# Altium PCB MainBoard.PcbDoc (part 1 of 2)
Units mm, origin at the board's own origin, x right, y up, seen from the top; angles counter-clockwise.
Board outline 250 x 90 mm, 2 copper layers (Top Layer, Bottom Layer); 239 components, 149 nets, 765 pads, 496 vias.
Unrouted connection lines stored in the file: 4.
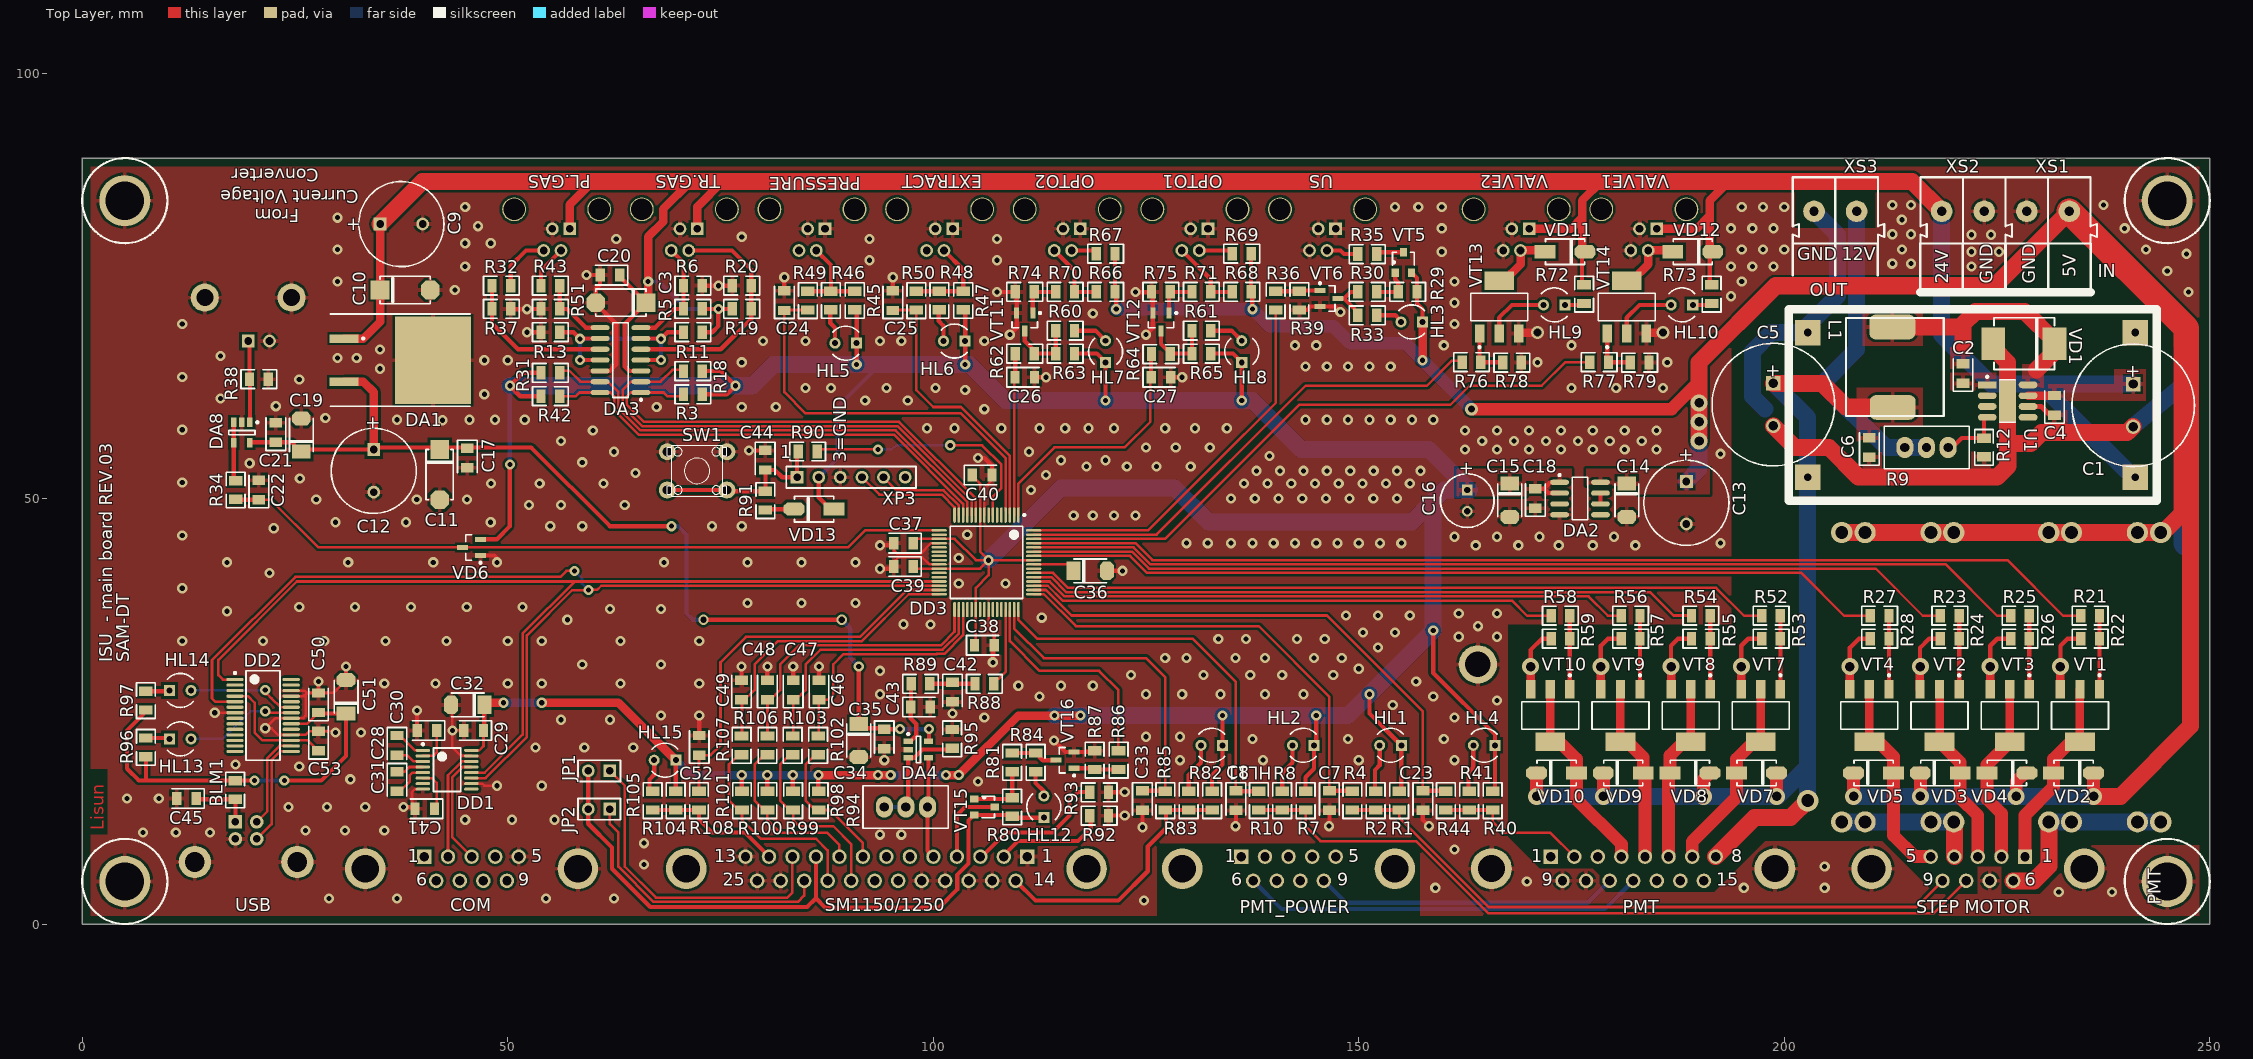
[diagram p0: Top Layer view]
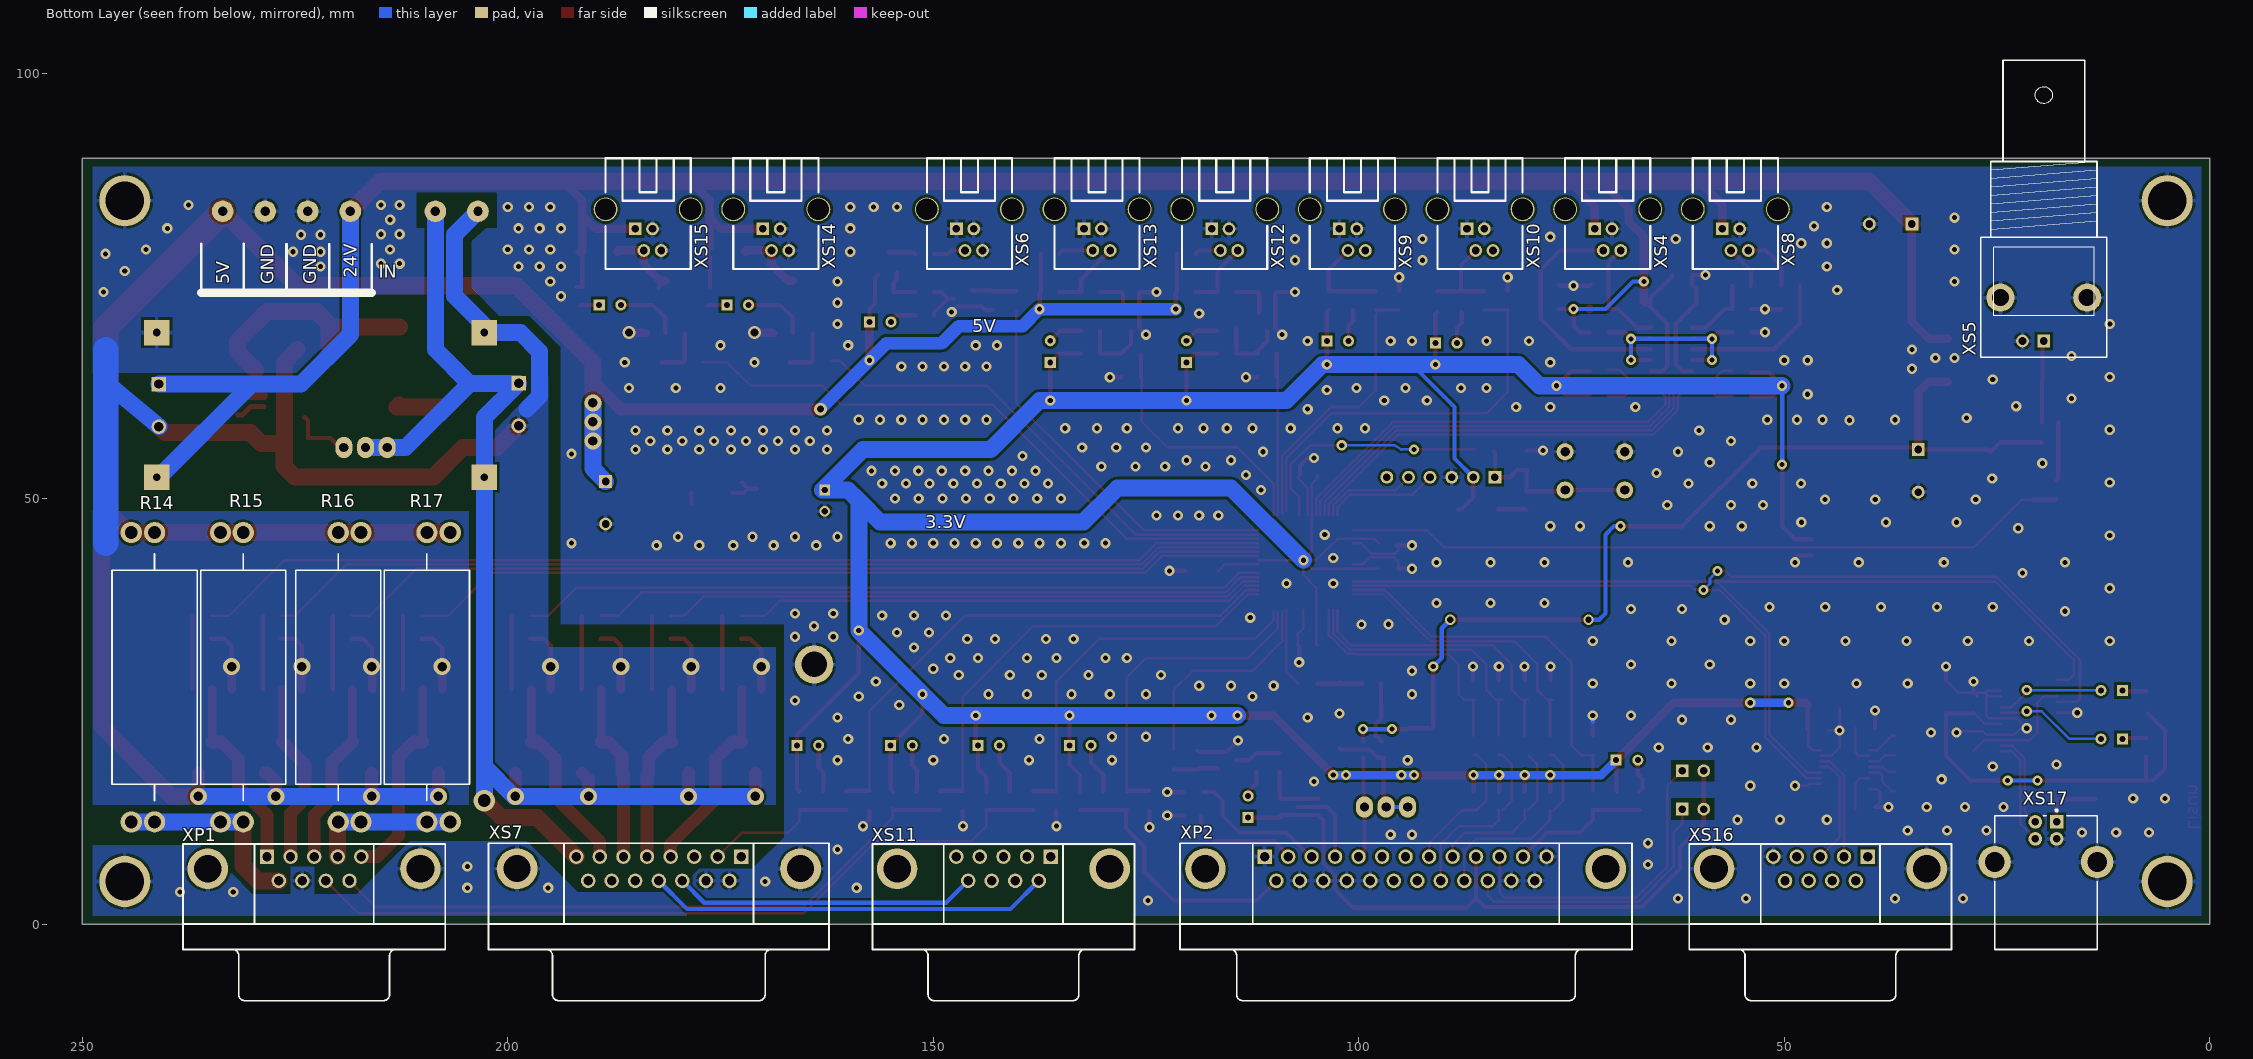
[diagram p1: Bottom Layer view, seen from below]

## Layer stack, top to bottom
Top Layer: signal copper 0.0356
Dielectric: dielectric 0.32, FR-4, Dk 4.8
Bottom Layer: signal copper 0.0356

## Board outline
250.001,0.002 250.001,90.002 0.001,90.002 0.001,0.002

## Design rules (kind name [scope] priority, off if disabled: settings)
Clearance Clearance_2 [All vs IsRegion] p1: gap=0.3
Clearance Clearance_1 [(InComponentClass('All Components')) vs (InComponentClass('All Components'))] p2: gap=0.2
Clearance [(InNetClass('All Nets')) vs (InNetClass('All Nets'))] p3: gap=0.2
ComponentClearance [All] p1: gap=0.2 collisioncheckmode=3 verticalgap=0.3 showdistances=FALSE
HoleSize [All] p1: absolutevalues=TRUE maxlimit=5 minlimit=0.025 maxpercent=80.000 minpercent=20.000
PlaneClearance PlaneClearance_1 [(InNetClass('All Nets'))] p1: clearance=0.5
PlaneClearance [All] p2: clearance=1.5
PlaneConnect [All] p1: planeconnectstyle=Relief reliefexpansion=0.508 reliefentries=4 reliefconductorwidth=0.5 reliefairgap=0.5
PolygonConnect PolygonConnect_2 [Isvia] p1: connectstyle=Direct reliefconductorwidth=0.254 reliefentries=4 polygonreliefangle="90 Angle"
PolygonConnect PolygonConnect_1 [All] p2: connectstyle=Relief reliefconductorwidth=0.5 reliefentries=4 polygonreliefangle="90 Angle"
RoutingVias [All] p1: holewidth=0.6 width=1 viastyle="Through Hole" minholewidth=0.5 minwidth=0.8 maxholewidth=4 maxwidth=4
SilkToSilkClearance [(InComponentClass('All Components')) vs (InComponentClass('All Components'))] p1: silktosilkclearance=0.1
SilkscreenOverComponentPads [All] p1: minsilkscreentomaskgap=0.1
SolderMaskExpansion [All] p1: expansion=0.102
Width [All] p1: maxlimit=3 minlimit=0.2 preferedwidth=0.2
22 further rules are at their usual default settings.

## Components (designator, comment, footprint, x,y, rotation, side; value= is the part's Value field where it differs from the comment)
BLM1 "BLM21PG221SN1D" CR2012-0805#1 18.001,15.752 r90 top
C1 "Конденсатор К50-68" CAPPR5-14x20 241.001,60.952 r270 top
C2 "Конденсатор ЧИП" CC2012-0805 221.001,64.702 r270 top
C3 "Tantal C case" C 63.251,73.017 r0 top
C4 "Конденсатор ЧИП" CC2012-0805 231.751,60.952 r270 top
C5 "Конденсатор К50-68" CAPPR5-14x20 198.721,61.035 r270 top
C6 "Конденсатор ЧИП" CC2012-0805 210.001,56.002 r270 top
C7 "Конденсатор ЧИП" CC2012-0805 146.549,14.502 r90 top
C8 "Конденсатор ЧИП" CC2012-0805 135.563,14.502 r90 top
C9 "Конденсатор К50-68" CAPPR5-10x20 37.501,82.252 r0 top
C10 "Tantal C case" C 38.001,74.502 r180 top
C11 "Tantal C case" C 42.001,52.752 r90 top
C12 "Конденсатор К50-68" CAPPR5-10x20 34.251,53.252 r270 top
C13 "Конденсатор К50-68" CAPPR5-10x20 188.501,49.502 r270 top
C14 "Tantal B case" B 181.501,49.752 r90 top
C15 "Tantal B case" B 167.751,49.752 r90 top
C16 "Конденсатор К50-68" CAPPR2.5-6.3X5 162.751,49.752 r270 top
C17 "Конденсатор ЧИП" CC2012-0805 45.251,54.752 r90 top
C18 "Конденсатор ЧИП" CC2012-0805 170.751,50.002 r270 top
C19 "Tantal B case" B 25.751,57.502 r270 top
C20 "Конденсатор ЧИП" CC2012-0805 62.001,76.252 r0 top
C21 "Конденсатор ЧИП" CC2012-0805 22.751,57.752 r270 top
C22 "Конденсатор ЧИП" CC2012-0805 20.751,51.002 r270 top
C23 "Конденсатор ЧИП" CC2012-0805 157.536,14.502 r90 top
C24 "Конденсатор ЧИП" CC2012-0805 82.501,73.252 r270 top
C25 "Конденсатор ЧИП" CC2012-0805 95.251,73.252 r270 top
C26 "Конденсатор ЧИП" CC2012-0805 110.751,64.252 r180 top
C27 "Конденсатор ЧИП" CC2012-0805 126.751,64.252 r180 top
C28 "Конденсатор ЧИП" CC2012-0805 37.001,21.002 r90 top
C29 "Конденсатор ЧИП" CC2012-0805 46.001,22.752 r0 top
C30 "Конденсатор ЧИП" CC2012-0805 40.501,22.752 r0 top
C31 "Конденсатор ЧИП" CC2012-0805 37.001,16.752 r90 top
C32 "Tantal B case" B 45.251,25.752 r0 top
C33 "Конденсатор ЧИП" CC2012-0805 124.576,14.502 r90 top
C34 "Tantal B case" B 91.251,21.502 r90 top
C35 "Конденсатор ЧИП" CC2012-0805 94.251,21.752 r90 top
C36 "Tantal B case" B 118.501,41.502 r180 top
C37 "Конденсатор ЧИП" CC2012-0805 96.501,44.752 r0 top
C38 "Конденсатор ЧИП" CC2012-0805 106.001,32.752 r180 top
C39 "Конденсатор ЧИП" CC2012-0805 96.501,42.002 r0 top
C40 "Конденсатор ЧИП" CC2012-0805 105.751,52.752 r180 top
C41 "Конденсатор ЧИП" CC2012-0805 40.251,13.552 r0 top
C42 "Конденсатор ЧИП" CC2012-0805 102.251,27.252 r90 top
C43 "Конденсатор ЧИП" CC2012-0805 98.501,25.502 r180 top
C44 "Конденсатор ЧИП" CC2012-0805 80.251,54.502 r90 top
C45 "Конденсатор ЧИП" CC2012-0805 12.251,14.752 r0 top
C46 "Конденсатор ЧИП" CC2012-0805 86.576,27.502 r270 top
C47 "Конденсатор ЧИП" CC2012-0805 83.543,27.502 r270 top
C48 "Конденсатор ЧИП" CC2012-0805 80.509,27.502 r270 top
C49 "Конденсатор ЧИП" CC2012-0805 77.476,27.502 r270 top
C50 "Конденсатор ЧИП" CC2012-0805 27.751,26.002 r270 top
C51 "Tantal B case" B 31.001,26.752 r270 top
C52 "Конденсатор ЧИП" CC2012-0805 72.501,21.002 r270 top
C53 "Конденсатор ЧИП" CC2012-0805 27.751,21.502 r270 top
DA1 "L7812ACD2T" TO-263 36.001,66.252 r270 top
DA2 "LP2951CD-3.3" 751-05_N 176.001,50.002 r0 top
DA3 "LM339AD" SO14_N 63.251,66.267 r180 top
DA4 "LM321MF" MF05A_N 98.251,20.502 r0 top
DA8 "LM321MF" MF05A_N 18.751,57.752 r270 top
DD1 "MAX3232CUE" TSSOP16_N 42.876,18.127 r0 top
DD2 "FT232RL" SOP65P760-28L 21.251,24.502 r0 top
DD3 "PIC24FJ128GA106-I/PT" TQFP-PT64_N 106.251,42.502 r270 top
HL1 "LED" "LED 2.54mm" 155.001,21.002 r270 top
HL2 "LED" "LED 2.54mm" 144.751,21.002 r270 top
HL3 "LED" "LED 2.54mm" 157.501,70.752 r270 top
HL4 "LED" "LED 2.54mm" 166.001,21.002 r270 top
HL5 "LED" "LED 2.54mm" 91.001,68.252 r270 top
HL6 "LED" "LED 2.54mm" 103.751,68.502 r270 top
HL7 "LED" "LED 2.54mm" 120.251,66.002 r180 top
HL8 "LED" "LED 2.54mm" 136.251,66.002 r180 top
HL9 "LED" "LED 2.54mm" 174.251,72.752 r270 top
HL10 "LED" "LED 2.54mm" 189.251,72.752 r270 top
HL11 "LED" "LED 2.54mm" 134.001,21.002 r270 top
HL12 "LED" "LED 2.54mm" 113.001,12.502 r180 top
HL13 "LED" "LED 2.54mm" 10.251,21.752 r90 top
HL14 "LED" "LED 2.54mm" 10.251,27.451 r90 top
HL15 "LED" "LED 2.54mm" 69.751,19.252 r270 top
JP1 "Перемычка вилка 2x" HDR2 62.001,18.002 r180 top
JP2 "Перемычка вилка 2x" HDR2 62.001,13.502 r180 top
L1 "Индуктивность CDRH127" CDRH127 212.751,70.202 r270 top
R1 "резистор чип" CR2012-0805#1 154.764,14.502 r90 top
R2 "резистор чип" CR2012-0805#1 151.968,14.502 r270 top
R3 "резистор чип" CR2012-0805#1 71.751,62.267 r180 top
R4 "резистор чип" CR2012-0805#1 149.271,14.502 r90 top
R5 "резистор чип" CR2012-0805#1 71.751,72.255 r0 top
R6 "резистор чип" CR2012-0805#1 71.751,74.992 r0 top
R7 "резистор чип" CR2012-0805#1 143.778,14.502 r90 top
R8 "резистор чип" CR2012-0805#1 140.981,14.502 r270 top
R9 "Trimming Potentiometer" 3296W 219.251,56.002 r180 top
R10 "резистор чип" CR2012-0805#1 138.284,14.502 r90 top
R11 "резистор чип" CR2012-0805#1 71.751,69.517 r0 top
R12 "резистор чип" CR2012-0805#1 223.501,56.002 r90 top
R13 "резистор чип" CR2012-0805#1 55.001,69.567 r180 top
R14 "Резистор 5 Вт" SQP5W 241.501,12.002 r90 bottom
R15 "Резистор 5 Вт" SQP5W 231.084,12.002 r90 bottom
R16 "Резистор 5 Вт" SQP5W 219.918,12.002 r90 bottom
R17 "Резистор 5 Вт" SQP5W 209.501,12.002 r90 bottom
R18 "резистор чип" CR2012-0805#1 71.751,65.002 r180 top
R19 "резистор чип" CR2012-0805#1 77.501,72.305 r180 top
R20 "резистор чип" CR2012-0805#1 77.501,75.042 r180 top
R21 "резистор чип" CR2012-0805#1 235.951,36.252 r180 top
R22 "резистор чип" CR2012-0805#1 235.951,33.502 r0 top
R23 "резистор чип" CR2012-0805#1 219.451,36.202 r0 top
R24 "резистор чип" CR2012-0805#1 219.451,33.502 r0 top
R25 "резистор чип" CR2012-0805#1 227.701,36.202 r0 top
R26 "резистор чип" CR2012-0805#1 227.701,33.502 r0 top
R27 "резистор чип" CR2012-0805#1 211.201,36.202 r0 top
R28 "резистор чип" CR2012-0805#1 211.201,33.502 r0 top
R29 "резистор чип" CR2012-0805#1 155.751,74.252 r0 top
R30 "резистор чип" CR2012-0805#1 151.001,74.252 r0 top
R31 "резистор чип" CR2012-0805#1 55.001,64.752 r0 top
R32 "резистор чип" CR2012-0805#1 49.251,74.992 r0 top
R33 "резистор чип" CR2012-0805#1 151.001,71.502 r0 top
R34 "резистор чип" CR2012-0805#1 18.001,51.002 r270 top
R35 "резистор чип" CR2012-0805#1 151.001,78.752 r180 top
R36 "резистор чип" CR2012-0805#1 140.251,73.252 r90 top
R37 "резистор чип" CR2012-0805#1 49.251,72.255 r0 top
R38 "резистор чип" CR2012-0805#1 20.751,64.002 r0 top
R39 "резистор чип" CR2012-0805#1 143.001,73.252 r270 top
R40 "резистор чип" CR2012-0805#1 165.751,14.502 r90 top
R41 "резистор чип" CR2012-0805#1 162.954,14.502 r270 top
R42 "резистор чип" CR2012-0805#1 55.001,62.002 r0 top
R43 "резистор чип" CR2012-0805#1 55.001,75.042 r180 top
R44 "резистор чип" CR2012-0805#1 160.258,14.502 r90 top
R45 "резистор чип" CR2012-0805#1 90.751,73.267 r270 top
R46 "резистор чип" CR2012-0805#1 88.001,73.267 r90 top
R47 "резистор чип" CR2012-0805#1 103.501,73.267 r270 top
R48 "резистор чип" CR2012-0805#1 100.751,73.267 r90 top
R49 "резистор чип" CR2012-0805#1 85.251,73.252 r270 top
R50 "резистор чип" CR2012-0805#1 98.001,73.252 r270 top
R51 "резистор чип" CR2012-0805#1 55.001,72.305 r180 top
R52 "резистор чип" CR2012-0805#1 198.451,36.202 r0 top
R53 "резистор чип" CR2012-0805#1 198.451,33.502 r0 top
R54 "резистор чип" CR2012-0805#1 190.201,36.202 r0 top
R55 "резистор чип" CR2012-0805#1 190.201,33.502 r0 top
R56 "резистор чип" CR2012-0805#1 181.951,36.202 r0 top
R57 "резистор чип" CR2012-0805#1 181.951,33.502 r0 top
R58 "резистор чип" CR2012-0805#1 173.701,36.202 r0 top
R59 "резистор чип" CR2012-0805#1 173.701,33.502 r0 top
R60 "резистор чип" CR2012-0805#1 115.501,69.752 r180 top
R61 "резистор чип" CR2012-0805#1 131.501,69.752 r180 top
R62 "резистор чип" CR2012-0805#1 110.751,67.002 r0 top
R63 "резистор чип" CR2012-0805#1 115.501,67.002 r0 top
R64 "резистор чип" CR2012-0805#1 126.751,67.002 r180 top
R65 "резистор чип" CR2012-0805#1 131.501,67.002 r0 top
R66 "резистор чип" CR2012-0805#1 120.251,74.252 r0 top
R67 "резистор чип" CR2012-0805#1 120.251,78.752 r0 top
R68 "резистор чип" CR2012-0805#1 136.251,74.252 r0 top
R69 "резистор чип" CR2012-0805#1 136.251,78.752 r0 top
R70 "резистор чип" CR2012-0805#1 115.501,74.252 r0 top
R71 "резистор чип" CR2012-0805#1 131.501,74.252 r0 top
R72 "резистор чип" CR2012-0805#1 176.501,74.017 r90 top
R73 "резистор чип" CR2012-0805#1 191.501,74.017 r90 top
R74 "резистор чип" CR2012-0805#1 110.751,74.252 r0 top
R75 "резистор чип" CR2012-0805#1 126.751,74.252 r0 top
R76 "резистор чип" CR2012-0805#1 163.251,66.002 r0 top
R77 "резистор чип" CR2012-0805#1 178.251,66.002 r0 top
R78 "резистор чип" CR2012-0805#1 168.001,66.002 r180 top
R79 "резистор чип" CR2012-0805#1 183.001,66.002 r180 top
R80 "резистор чип" CR2012-0805#1 109.251,13.752 r270 top
R81 "резистор чип" CR2012-0805#1 109.251,19.002 r270 top
R82 "резистор чип" CR2012-0805#2 132.741,14.502 r90 top
R83 "резистор чип" CR2012-0805#2 130.044,14.502 r270 top
R84 "резистор чип" CR2012-0805#1 112.001,19.002 r270 top
R85 "резистор чип" CR2012-0805#2 127.248,14.502 r90 top
R86 "резистор чип" CR2012-0805#1 121.751,19.252 r270 top
R87 "резистор чип" CR2012-0805#1 119.001,19.252 r90 top
R88 "резистор чип" CR2012-0805#1 106.001,28.252 r180 top
R89 "резистор чип" CR2012-0805#1 98.501,28.252 r180 top
R90 "резистор чип" CR2012-0805#1 85.251,55.502 r0 top
R91 "резистор чип" CR2012-0805#1 80.251,49.752 r270 top
R92 "резистор чип" CR2012-0805#2 119.501,12.752 r0 top
R93 "резистор чип" CR2012-0805#2 119.501,15.502 r0 top
R94 "Trimming Potentiometer" 3296W 94.251,13.752 r0 top
R95 "резистор чип" CR2012-0805#1 102.251,21.752 r90 top
R96 "резистор чип" CR2012-0805#1 7.501,20.752 r90 top
R97 "резистор чип" CR2012-0805#1 7.501,26.252 r90 top
R98 "резистор чип" CR2012-0805#1 86.501,14.502 r270 top
R99 "резистор чип" CR2012-0805#1 83.501,14.502 r270 top
R100 "резистор чип" CR2012-0805#1 80.501,14.502 r270 top
R101 "резистор чип" CR2012-0805#1 77.501,14.502 r270 top
R102 "резистор чип" CR2012-0805#1 86.501,21.002 r90 top
R103 "резистор чип" CR2012-0805#1 83.501,21.002 r90 top
R104 "резистор чип" CR2012-0805#1 69.751,14.502 r90 top
R105 "резистор чип" CR2012-0805#1 67.001,14.502 r270 top
R106 "резистор чип" CR2012-0805#1 80.551,21.002 r90 top
R107 "резистор чип" CR2012-0805#1 77.501,21.002 r90 top
R108 "резистор чип" CR2012-0805#1 72.501,14.502 r90 top
SW1 "SW-SPST" SWT-20 72.251,53.252 r0 top
U1 "TPS5430" SOIC127P600X170_HS-8N 226.251,61.452 r0 top
VD1 "MBRS340" SMC 231.751,68.202 r180 top
VD2 "Диод общего применения" D-64 234.001,17.752 r180 top
VD3 "Диод общего применения" D-64 218.334,17.752 r0 top
VD4 "Диод общего применения" D-64 226.168,17.752 r180 top
VD5 "Диод общего применения" D-64 210.501,17.752 r0 top
VD6 "BAT54S" SOT23_N 45.751,44.252 r180 top
VD7 "Диод общего применения" D-64 196.751,17.752 r180 top
VD8 "Диод общего применения" D-64 188.918,17.752 r180 top
VD9 "Диод общего применения" D-64 181.084,17.752 r0 top
VD10 "Диод общего применения" D-64 173.251,17.752 r0 top
VD11 "Диод общего применения" D-64 174.251,79.002 r180 top
VD12 "Диод общего применения" D-64 189.251,79.002 r180 top
VD13 "Диод общего применения" D-64 86.001,48.752 r0 top
VT1 "IRLL2705" SOT-223 234.751,24.502 r180 top
VT2 "IRLL2705" SOT-223 218.251,24.502 r180 top
VT3 "IRLL2705" SOT-223 226.501,24.502 r180 top
VT4 "IRLL2705" SOT-223 210.001,24.502 r180 top
VT5 "AO3401" SOT23 155.251,77.752 r0 top
VT6 "2N7002" SOT23_N 146.501,73.502 r0 top
VT7 "IRLL2705" SOT-223 197.251,24.502 r180 top
VT8 "IRLL2705" SOT-223 189.001,24.502 r180 top
VT9 "IRLL2705" SOT-223 180.751,24.502 r180 top
VT10 "IRLL2705" SOT-223 172.501,24.502 r180 top
VT11 "2N7002" SOT23_N 110.751,70.752 r270 top
VT12 "2N7002" SOT23_N 126.751,70.752 r270 top
VT13 "IRLL2705" SOT-223 166.501,72.502 r0 top
VT14 "IRLL2705" SOT-223 181.501,72.502 r0 top
VT15 "AO3401" SOT23 106.001,13.752 r270 top
VT16 "2N7002" SOT23_N 115.501,19.252 r180 top
XP1 "Вилка" DSUB1.385-2H9#1 222.751,-2.998 r180 bottom
XP2 "D Connector 25" DSUB1.385-2H25A 94.501,-2.998 r180 bottom
XP3 "ICD2" HDR1X6 84.001,52.502 r0 top
XS1 "DG126-5.0-02P-14" DG126-5.0-02P-14 233.501,83.752 r180 top
XS2 "DG126-5.0-02P-14" DG126-5.0-02P-14 223.501,83.752 r180 top
XS3 "DG126-5.0-02P-14" DG126-5.0-02P-14 208.501,83.752 r180 top
XS4 "Female" TJ1A 65.751,77.002 r0 bottom
XS5 "BNC" "BNC_RA CON" 19.501,68.502 r270 bottom
XS6 "Female" TJ1A 140.751,77.002 r0 bottom
XS7 "Гнездо" DSUB1.385-2H15 182.251,-2.998 r0 bottom
XS8 "Female" TJ1A 50.751,77.002 r0 bottom
XS9 "Female" TJ1A 95.751,77.002 r0 bottom
XS10 "Female" TJ1A 80.751,77.002 r0 bottom
XS11 "Гнездо" DSUB1.385-2H9#2 141.751,-2.998 r0 bottom
XS12 "Female" TJ1A 110.751,77.002 r0 bottom
XS13 "Female" TJ1A 125.751,77.002 r0 bottom
XS14 "Female" TJ1A 163.501,77.002 r0 bottom
XS15 "Female" TJ1A 178.501,77.002 r0 bottom
XS16 "D Connector 9" DSUB1.385-2H9#2 45.751,-2.998 r0 bottom
XS17 "USB-B" 787780 19.251,11.002 r270 bottom

## Footprints (in the part's own frame and the unit in brackets; to place one, negate y for a bottom-side part, rotate by r counter-clockwise, add the part's x,y. Pads: shape width x height; smd on the part's side, far side on the other; paste and mask are expansions set on the pad)
751-05_N [mm] "SOIC, 8-Leads, Body 4.9x3.9mm, Pitch 1.27mm, IPC Medium Density"
  oval 2.2x0.6 smd: 1(-2.4,1.905) 2(-2.4,0.635) 3(-2.4,-0.635) 4(-2.4,-1.905) 5(2.4,-1.905) 6(2.4,-0.635) 7(2.4,0.635) 8(2.4,1.905)
  silkscreen extent -2.52,-2.5 0.9,2.88, body extent -1.95,-2.45 1.95,2.45, height 1.75
3296W [mm]
  oval 2x2.5 hole 1.1: 1(0,0) 2(2.54,0) 3(5.08,0)
  silkscreen extent -2.5,-2.5 7.5,2.5
787780 [mm] "Connector; USB1.1, Type B, Thru-Hole; 4 Position; Right Angle"
  rect 1.6x1.6 hole 0.9: 1(-1,1.25)
  round 1.6 hole 0.9: 2(-1,-1.25) 3(1,-1.25) 4(1,1.25)
  round 3.8 hole 2.3: 5(3.71,6.02) 6(3.71,-6.02)
  silkscreen extent -2.47,-6.02 13.99,6.02
B [mm]
  oct 1.65x2.2 smd: 1(-1.9,0)
  rect 1.65x2.2 smd: 2(2,0)
  silkscreen extent -1.9,-1.4 2,1.4
"BNC_RA CON" [mm] "Connector; BNC Elbow"
  rect 1.5x1.5 hole 0.9: 1(0,0)
  round 3.3 hole 2: 2(-5.1,-5.1) 2(-5.1,5.1)
  round 1.5 hole 0.9: 2(0,-2.5)
  silkscreen extent -33,-7.4 1.9,7.4
C [mm]
  oct 2.2x2.2 smd: 1(-2.9,0)
  rect 2.2x2.2 smd: 2(3,0)
  silkscreen extent -2.9,-1.6 3,1.6
CAPPR2.5-6.3X5 [mm]
  rect 1.25x1.25 hole 0.75: 1(-1.25,0)
  round 1.25 hole 0.75: 2(1.25,0)
  silkscreen extent -3.15,-3.15 3.15,3.15
CAPPR5-10x20 [mm]
  rect 1.5x1.5 hole 0.9: 1(-2.5,0)
  round 1.5 hole 0.9: 2(2.5,0)
  silkscreen extent -5,-5 5,5
CAPPR5-14x20 [mm]
  rect 1.7x1.7 hole 1.1: 1(-2.5,0)
  round 1.7 hole 1.1: 2(2.5,0)
  silkscreen extent -7.2,-7.2 7.2,7.2
CC2012-0805 [mm]
  rect 1.1x1.5 smd: 1(-1.15,0) 2(1.15,0)
  silkscreen extent -1.7,-1.15 2.1,1.15
CDRH127 [mm] "Inductor"
  rrect50% 2.9x5.4 smd: 1(0.05,-0.05) 2(9.5,0)
  silkscreen extent -1,-5.5 10.5,6
CR2012-0805#1 [mm]
  rect 1.1x1.6 smd: 1(-1.1,0.025) 2(1.1,0.025)
  silkscreen extent -2.1,-1.07 2.1,1.12
CR2012-0805#2 [mm]
  rect 1.1x1.6 smd: 1(-1.1,-0.025) 2(1.1,-0.025)
  silkscreen extent -2.1,-1.12 2.1,1.07
D-64 [mm] "Molded Diode, 2-Leads, Body 4,3x2,7mm, IPC Medium Density"
  oct 2.45x1.55 smd: 1(-2.35,0)
  rect 2.45x1.55 smd: 2(2.35,0)
  silkscreen extent -2.3,-1.5 2.3,1.5, body extent -2.3,-1.45 2.3,1.45, height 2.44
DG126-5.0-02P-14 [mm]
  round 2.54 hole 1.1: 1(0,0) 2(5,0)
  silkscreen extent -3.25,-4 7.5,3.8
DSUB1.385-2H9#1 [mm] "Connector; D Subminiature; 9 Position; Right Angle; Pitch 1.385 mm"
  rect 1.7x1.7 hole 1.1: 1(-5.54,10.92)
  round 1.7 hole 1.1: 2(-2.77,10.92) 3(0,10.92) 4(2.77,10.92) 5(5.54,10.92) 6(-4.155,8.08) 7(-1.385,8.08) 8(1.385,8.08) 9(4.155,8.08)
  round 4.76 hole 3.26: 10(-12.495,9.5) 11(12.495,9.5)
  silkscreen extent -15.4,-6 15.4,12.4
DSUB1.385-2H9#2 [mm] "Connector; D Subminiature; 9 Position; Right Angle; Pitch 1.385 mm"
  rect 1.7x1.7 hole 1.1: 1(-5.54,-10.92)
  round 1.7 hole 1.1: 2(-2.77,-10.92) 3(0,-10.92) 4(2.77,-10.92) 5(5.54,-10.92) 6(-4.155,-8.08) 7(-1.385,-8.08) 8(1.385,-8.08) 9(4.155,-8.08)
  round 4.76 hole 3.26: 10(-12.495,-9.5) 11(12.495,-9.5)
  silkscreen extent -15.4,-12.4 15.4,6
DSUB1.385-2H15 [mm] "Connector; D Subminiature; 15 Position; Right Angle; Pitch 1.385 mm"
  rect 1.7x1.7 hole 1.1: 1(-9.695,-10.92)
  round 1.7 hole 1.1: 2(-6.925,-10.92) 3(-4.155,-10.92) 4(-1.385,-10.92) 5(1.385,-10.92) 6(4.155,-10.92) 7(6.925,-10.92) 8(9.695,-10.92) 9(-8.31,-8.08) 10(-5.54,-8.08) 11(-2.77,-8.08) 12(0,-8.08) 13(2.77,-8.08) 14(5.54,-8.08) 15(8.31,-8.08)
  round 4.8 hole 3.18: 16(-16.66,-9.5) 17(16.66,-9.5)
  silkscreen extent -20,-12.5 20,6
DSUB1.385-2H25A [mm] "Connector; D Subminiature; 25 Position; Right Angle; Pitch 1.385 mm"
  rect 1.7x1.7 hole 1.1: 1(-16.566,10.92)
  round 1.7 hole 1.1: 2(-13.805,10.92) 3(-11.044,10.92) 4(-8.283,10.92) 5(-5.522,10.92) 6(-2.761,10.92) 7(0,10.92) 8(2.761,10.92) 9(5.522,10.92) 10(8.283,10.92) 11(11.044,10.92) 12(13.805,10.92) 13(16.566,10.92) 14(-15.185,8.08) 15(-12.424,8.08) 16(-9.663,8.08) 17(-6.902,8.08) 18(-4.141,8.08) 19(-1.38,8.08) 20(1.381,8.08) 21(4.142,8.08) 22(6.903,8.08) 23(9.664,8.08) 24(12.425,8.08) 25(15.186,8.08)
  round 4.76 hole 3.26: 26(-23.526,9.5) 27(23.526,9.5)
  silkscreen extent -26.5,-6 26.6,12.5
HDR1X6 [mm] "Connector; Header; 6 Position"
  rect 1.5x1.5 hole 0.9: 1(0,0)
  round 1.5 hole 0.9: 2(2.54,0) 3(5.08,0) 4(7.62,0) 5(10.16,0) 6(12.7,0)
  silkscreen extent -1.27,-1.27 13.97,1.27
HDR2 [mm]
  rect 1.5x1.5 hole 0.9: 1(0,0)
  round 1.5 hole 0.9: 2(2.54,0)
  silkscreen extent -1.25,-1.25 3.75,1.25
"LED 2.54mm" [mm]
  rect 1.3x1.3 hole 0.7: 1(0,0)
  round 1.3 hole 0.7: 2(0,-2.54)
  silkscreen extent -2,-2.79 2,0.23
MF05A_N [mm] "SOT23, 5-Leads, Body 2.9x1.6mm, Pitch 0.95mm, Lead Span 2.8mm, IPC Medium Density"
  rect 1.1x0.65 smd: 1(-1.2,0.95) 2(-1.2,0) 3(-1.2,-0.95) 4(1.2,-0.95) 5(1.2,0.95)
  silkscreen extent -1.32,-1.55 0.25,1.95, body extent -0.9,-1.55 0.9,1.55, height 1.22
SMC [mm]
  rect 2.8x3.8 smd: 1(0,0) 2(7.2,0)
  silkscreen extent 0,-3.05 7.12,3.05
SO14_N [mm] "SOIC, 14-Leads, Body 8.7x3.9mm, Pitch 1.27mm, IPC Medium Density"
  oval 2.2x0.6 smd: 1(-2.4,3.81) 2(-2.4,2.54) 3(-2.4,1.27) 4(-2.4,0) 5(-2.4,-1.27) 6(-2.4,-2.54) 7(-2.4,-3.81) 8(2.4,-3.81) 9(2.4,-2.54) 10(2.4,-1.27) 11(2.4,0) 12(2.4,1.27) 13(2.4,2.54) 14(2.4,3.81)
  silkscreen extent -2.53,-4.4 0.9,4.78, body extent -1.95,-4.33 1.95,4.33, height 1.75
SOIC127P600X170_HS-8N [mm] "SOIC, 8-Leads, Body 5,0x4,0mm (max), Pitch 1,27mm, IPC Medium Density"
  rect 2.2x0.8 smd: 1(-2.4,1.905)
  oval 2.2x0.8 smd: 2(-2.4,0.635) 3(-2.4,-0.635) 4(-2.4,-1.905) 5(2.4,-1.905) 6(2.4,-0.635) 7(2.4,0.635) 8(2.4,1.905)
  rect 2x5 smd: 9(0,0)
  silkscreen extent -2.52,-2.5 0.9,2.98, body extent -2,-2.5 2,2.5, height 1.7
SOP65P760-28L [mm]
  oval 2.032x0.381 smd: 1(-3.3,4.225) 2(-3.3,3.575) 3(-3.3,2.925) 4(-3.3,2.275) 5(-3.3,1.625) 6(-3.3,0.975) 7(-3.3,0.325) 8(-3.3,-0.325) 9(-3.3,-0.975) 10(-3.3,-1.625) 11(-3.3,-2.275) 12(-3.3,-2.925) 13(-3.3,-3.575) 14(-3.3,-4.225) 15(3.3,-4.225) 16(3.3,-3.575) 17(3.3,-2.925) 18(3.3,-2.275) 19(3.3,-1.625) 20(3.3,-0.975) 21(3.3,-0.325) 22(3.3,0.325) 23(3.3,0.975) 24(3.3,1.625) 25(3.3,2.275) 26(3.3,2.925) 27(3.3,3.575) 28(3.3,4.225)
  silkscreen extent -3.42,-5.25 2,5.25, body extent -2.8,-5.25 2.8,5.25, height 2
SOT23 [mm] "SOT-23; 3 Leads; Body 3.0 x 2.5 mm, inc. leads (LxW max)"
  rect 0.85x1 smd: 1(-0.95,-1.2) 2(0.95,-1.2) 3(0,1.2)
  silkscreen extent -1.27,-0.3 1.28,1.2
SOT23_N [mm] "SOT23, 3-Leads, Body 2.9x1.3mm, Pitch 0.95mm, Lead Span 2.3mm, IPC Medium Density"
  rect 1.3x0.6 smd: 1(-1.05,0.95) 2(-1.05,-0.95) 3(1.05,0)
  silkscreen extent -1.18,-1.5 0.7,1.92, body extent -0.7,-1.5 0.7,1.5, height 1.1
SOT-223 [mm] "SOT-223/SC-73; 4 Leads; Body 6.7 x 7.3 mm, inc. leads (LxW max)"
  rect 1.1x2.15 smd: 1(-2.3,-3.1) 2(0,-3.1) 3(2.3,-3.1)
  rect 3.5x2.15 smd: 4(0,3.1)
  silkscreen extent -3.35,-4.85 3.35,1.63
SQP5W [mm]
  round 2.5 hole 1.5: 1(0,0) 2(34,0)
  silkscreen extent 2.5,-5 31.5,5
SWT-20 [mm]
  round 2 hole 1.1: 1(-3.5,2.25) 2(-3.5,-2.25) 3(3.5,2.25) 4(3.5,-2.25)
  silkscreen extent -3.5,-3 3.5,3
TJ1A [mm]
  rect 1.5x1.5 hole 0.9: 1(6.53,-4.685)
  round 1.5 hole 0.9: 2(5.51,-2.145) 3(4.49,-4.685) 4(3.47,-2.145)
  round 2.8 hole 2.5: 5(0,-6.985) 6(10,-6.985)
  silkscreen extent 0,-12.99 10,0.01
TO-263 [mm] "D2-PAK/TO-263-AB; 3 Leads (1 Cropped); Body 15.9 (inc. leads) x 10.4 mm (LxW max)"
  rect 1x3.4 smd: 1(-2.54,-5.225) 3(2.54,-5.225)
  rect 10.25x8.9 smd: 4(0,5.225)
  silkscreen extent -5.43,-6.83 5.43,9.57
TQFP-PT64_N [mm] "Thin QFP, 64-Leads, Body 10x10mm, Pitch 0.5mm, IPC Medium Density"
  oval 1.8x0.3 smd: 1(-5.55,3.75) 2(-5.55,3.25) 3(-5.55,2.75) 4(-5.55,2.25) 5(-5.55,1.75) 6(-5.55,1.25) 7(-5.55,0.75) 8(-5.55,0.25) 9(-5.55,-0.25) 10(-5.55,-0.75) 11(-5.55,-1.25) 12(-5.55,-1.75) 13(-5.55,-2.25) 14(-5.55,-2.75) 15(-5.55,-3.25) 16(-5.55,-3.75) 33(5.55,-3.75) 34(5.55,-3.25) 35(5.55,-2.75) 36(5.55,-2.25) 37(5.55,-1.75) 38(5.55,-1.25) 39(5.55,-0.75) 40(5.55,-0.25) 41(5.55,0.25) 42(5.55,0.75) 43(5.55,1.25) 44(5.55,1.75) 45(5.55,2.25) 46(5.55,2.75) 47(5.55,3.25) 48(5.55,3.75)
  oval 0.3x1.8 smd: 17(-3.75,-5.55) 18(-3.25,-5.55) 19(-2.75,-5.55) 20(-2.25,-5.55) 21(-1.75,-5.55) 22(-1.25,-5.55) 23(-0.75,-5.55) 24(-0.25,-5.55) 25(0.25,-5.55) 26(0.75,-5.55) 27(1.25,-5.55) 28(1.75,-5.55) 29(2.25,-5.55) 30(2.75,-5.55) 31(3.25,-5.55) 32(3.75,-5.55) 49(3.75,5.55) 50(3.25,5.55) 51(2.75,5.55) 52(2.25,5.55) 53(1.75,5.55) 54(1.25,5.55) 55(0.75,5.55) 56(0.25,5.55) 57(-0.25,5.55) 58(-0.75,5.55) 59(-1.25,5.55) 60(-1.75,5.55) 61(-2.25,5.55) 62(-2.75,5.55) 63(-3.25,5.55) 64(-3.75,5.55)
  silkscreen extent -5.67,-4.25 4.25,4.58, body extent -5,-5 5,5, height 1.2
TSSOP16_N [mm] "TSOP, 16-Leads, Body 5x4.4mm, Pitch 0.65mm, IPC Medium Density"
  oval 1.7x0.35 smd: 1(-2.85,2.275) 2(-2.85,1.625) 3(-2.85,0.975) 4(-2.85,0.325) 5(-2.85,-0.325) 6(-2.85,-0.975) 7(-2.85,-1.625) 8(-2.85,-2.275) 9(2.85,-2.275) 10(2.85,-1.625) 11(2.85,-0.975) 12(2.85,-0.325) 13(2.85,0.325) 14(2.85,0.975) 15(2.85,1.625) 16(2.85,2.275)
  silkscreen extent -2.97,-2.55 1.6,3.12, body extent -2.25,-2.55 2.25,2.55, height 1.1

## Part data
BLM1: library part BLM
C1 C5 C9 C12 C13 C16: "Электролитический конденсатор"
C2 C4 C6 C7 C8 C17 C18 C20 C21 C22 C23 C24 C25 C26 C27 C28 C29 C30 C31 C33 C35 C37 C38 C39 C40 C41 C42 C43 C44 C45 C46 C47 C48 C49 C50 C52 C53: "Чип конденсатор"
C3 C10 C11 C14 C15 C19 C32 C34 C36 C51: "Конденсатор танталовый LowESR"
DA1: "Precision 1A Regulator"
DA2: "MicroPower Voltage Regulator"
DA3: "Low-Power Quad Voltage Comparator"
DA4 DA8: "Low Power Single Op Amp"
DD1: "3.0V TO 5.5V, Low-Power, up to 1Mbps, True RS-232 Transceiver Using Four 0.1µF External Capacitor"
DD3: "General Purpose 16-Bit Flash Microcontroller, 128KB Flash, 16KB SRAM, 64-Pin TQFP, Industrial Temperature"
R1 R2 R3 R4 R5 R6 R7 R8 R10 R11 R12 R13 R18 R19 R20 R21 R22 R23 R24 R25 R26 R27 R28 R29 R30 R31 R32 R33 R34 R35 R36 R37 R38 R39 R40 R41 R42 R43 R44 R45 R46 R47 R48 R49 R50 R51 R52 R53 R54 R55 R56 R57 R58 R59 R60 R61 R62 R63 R64 R65 R66 R67 R68 R69 R70 R71 R72 R73 R74 R75 R76 R77 R78 R79 R80 R81 R82 R83 R84 R85 R86 R87 R88 R89 R90 R91 R92 R93 R95 R96 R97 R98 R99 R100 R101 R102 R103 R104 R105 R106 R107 R108: library part "Резистор ЧИП"
R9 R94: library part "Резистор переменный 3296W"
SW1: "Single-Pole, Single-Throw Switch"
VD1: library part "Диод MBRS340", "Диод"
VD2 VD3 VD4 VD5 VD7 VD8 VD9 VD10 VD11 VD12 VD13: library part 10MQ100N, "чип диод"
VD6: "Schottky Barrier Double Diode"
VT1 VT2 VT3 VT4 VT7 VT8 VT9 VT10 VT13 VT14: "HEXFET Power MOSFET"
VT6 VT11 VT12 VT16: "N-channel Enhancement Mode Field-effect Transistor"
XP1 XS11: library part "D Connector 9", "Receptacle Assembly, 9 Position, Right Angle"
XP2: "Receptacle Assembly, 25 Position, Right Angle"
XS4 XS6 XS8 XS9 XS10 XS12 XS13 XS14 XS15: library part TJ-4P4C
XS5: "BNC Elbow Connector"
XS7: library part "D Connector 15", "Receptacle Assembly, 15 Position, Right Angle"
XS16: "Receptacle Assembly, 9 Position, Right Angle"
XS17: library part 787780-1, "USB 1.1, Right Angle, Thru-Hole, B Type, Receptacle, 4 Position, Black"

## Free pads (board coordinates)
  rect 3x3 hole 0.9: 0(241.251,52.502) 1(241.251,69.502) 2(202.751,52.502) 3(202.751,69.502)
  round 6 hole 4.5: 1(5.001,85.002) 2(5.001,5.002) 3(245.001,5.002) 4(245.001,85.002)
  round 4.5 hole 3: 6(164.001,30.502)

## Via types
v1: diameter 1.2, hole 0.6, Top Layer to Bottom Layer, 463 vias
v2: diameter 2, hole 1.1, Top Layer to Bottom Layer, 19 vias
v3: diameter 2.5, hole 1.5, Top Layer to Bottom Layer, 9 vias
v4: diameter 1.5, hole 0.9, Top Layer to Bottom Layer, 2 vias
v5: diameter 1.2, hole 0.711, Top Layer to Bottom Layer, 2 vias
v6: diameter 1.5, hole 0.8, Top Layer to Bottom Layer, 1 vias

## Nets (pads, with @x,y where several pads share a name; then routed paths per layer and width w, separated by ;. In a path a pad name is that pad's centre, name@x,y a point inside that pad or via, vN(x,y) a via of type N, cw(c..) or ccw(c..) an arc to the next point about the centre after c; other vN are vias at no path point)
24V_SM: HL12.1 JP1.2 JP2.2 R80.2 VT15.2 XP2.10 | length 80.3
  Top Layer w0.3: 104.156,12.158 VT15.2@104.511,12.512
  Top Layer w0.5: JP1.2@59.461,18.002 59.461,11.792 62.251,9.002 62.251,6.502 66.751,2.002 85.185,2.002 86.218,3.035 ; XP2.10@86.218,7.922 86.218,3.035 ; R80.2@109.176,12.552 R80.2@109.276,12.652 ; HL12.1@113.001,12.502 109.426,12.502 R80.2@109.276,12.652 ; 86.218,3.035 87.355,1.899 100.651,1.899 102.81,4.058 102.81,5.759 104.156,7.106 104.156,12.158 VT15.2@104.801,12.802 109.126,12.802 R80.2@109.276,12.652
+3.3V: C15.2 C16.1 C18.1 C29.2 C32.2 C37.2 C38.2 C39.2 C40.2 DA2.1 DA2.2 DD1.16 DD3.10 DD3.19 DD3.26 DD3.38 DD3.57 HL1.1 HL2.1 HL4.1 HL5.1 HL6.1 HL7.1 HL8.1 HL11.1 HL15.1 R1.2 R3.1 R7.2 R18.1 R31.1 R40.2 R42.1 R45.2 R47.2 R63.2 R65.2 R82.2 R98.1 R99.1 R100.1 R101.1 R104.2 VD6.2 VD13.2 XP3.2 | length 537.6
  Top Layer w0.3: DD1.16@45.726,20.402 46.651,20.402 47.151,20.902 C29.2@47.151,22.752 ; C39.2@97.651,41.752 DD3.26@100.701,41.752 105.501,41.752 v1(106.501,42.752) ; C37.2@97.651,44.752 98.151,45.252 DD3.19@100.701,45.252 102.501,45.252 105.001,42.752 v1(106.501,42.752) ; C38.2@104.851,32.752 105.001,32.902 DD3.38@105.001,36.952 105.001,39.502 106.501,41.002 v1(106.501,42.752) ; C40.2@104.851,52.752 104.851,52.402 105.501,51.752 DD3.10@105.501,48.052 105.501,43.752 v1(106.501,42.752) ; DD3.57@111.801,42.752 v1(106.501,42.752)
  Top Layer w0.5: VD6.2@46.801,45.202 48.701,45.202 50.251,46.752 v1(50.251,54.002) ; C29.2@47.151,22.752 47.251,22.852 C32.2@47.251,25.752 ; R42.1@53.901,62.027 51.476,62.027 v1(50.251,63.252) 51.776,64.777 R31.1@53.901,64.777 ; R104.2@69.726,15.602 69.751,15.627 HL15.1@69.751,19.252 ; R3.1@72.851,62.242 75.741,62.242 v1(76.751,63.252) 75.026,64.977 R18.1@72.851,64.977 ; R3.1@72.851,62.369 R3.1@72.953,62.267 ; v1@77.501,17.752 77.501,15.627 R101.1@77.526,15.602 ; v1@80.501,17.752 80.501,15.627 R100.1@80.526,15.602 ; v1@83.501,17.752 83.501,15.627 R99.1@83.526,15.602 ; v1(86.501,17.502) 86.501,15.627 R98.1@86.526,15.602 ; XP3.2@86.541,52.502 86.541,50.112 87.901,48.752 VD13.2@88.351,48.752 ; R45.2@90.776,71.902 91.001,71.677 HL5.1@91.001,68.252 v1(91.001,65.752) ; R47.2@103.526,72.152 103.751,71.927 HL6.1@103.751,68.502 v1(103.751,65.752) ; R63.2@116.601,67.027 119.226,67.027 HL7.1@120.251,66.002 v1(120.251,61.502) ; R65.2@132.601,67.027 135.226,67.027 HL8.1@136.251,66.002 v1(136.251,61.502) ; R82.2@132.766,15.602 132.766,17.517 134.001,18.752 HL11.1@134.001,21.002 v1(134.001,24.502) ; R7.2@143.753,15.602 143.753,17.254 144.751,18.252 HL2.1@144.751,21.002 145.001,21.252 v1(145.001,24.502) ; v1(151.251,27.002) 151.251,24.752 HL1.1@155.001,21.002 155.001,15.864 R1.2@154.739,15.602 ; v1(158.751,34.502) 158.751,29.502 166.001,22.252 HL4.1@166.001,21.002 166.001,15.877 R40.2@165.726,15.602 ; C18.1@170.751,51.152 171.752,51.152 ; 172.441,51.841 171.752,51.152 ; DA2.2@173.601,50.637 172.267,50.637 171.752,51.152
  Top Layer w1: C32.2@47.251,25.752 47.501,26.002 v1(49.501,26.002) ; v1(54.001,26.002) 63.001,26.002 HL15.1@69.751,19.252 ; v1(86.501,17.502) v1(93.501,17.502) v1(95.001,17.502) ; v1(101.501,17.502) v1(103.001,17.502) 110.001,24.502 v1(114.251,24.502) v1(117.299,24.502)
  Bottom Layer w0.5: v1(50.251,54.002) v1(50.251,63.252) ; XP3.2@86.541,52.502 88.751,54.712 88.751,60.752 93.751,65.752
  Bottom Layer w1: v1(49.501,26.002) v1(54.001,26.002) ; HL15.1@69.751,19.252 71.501,17.502 v1(77.501,17.502) v1(80.501,17.502) v1(83.501,17.502) v1(86.501,17.502) ; v1(93.501,17.502) v1(95.001,17.502) v1(101.501,17.502) v1(103.001,17.502)
  Bottom Layer w2: v1(50.251,63.252) v1(76.751,63.252) 78.751,63.252 81.251,65.752 v1(91.001,65.752) 93.751,65.752 v1@103.251,65.752 ; v1(103.751,65.752) 104.251,65.752 108.501,61.502 v1(120.251,61.502) v1(136.251,61.502) 137.501,61.502 143.251,55.752 158.251,55.752 163.001,51.002 C16.1@162.751,51.002 160.001,51.002 158.751,49.752 ; v1(106.501,42.752) 115.001,51.252 128.366,51.252 132.366,47.252 156.251,47.252 158.751,49.752 ; v1(114.251,24.502) 117.001,24.502 120.251,24.502 132.751,24.502 v1(134.001,24.502) v1(145.001,24.502) 148.751,24.502 v1(151.251,27.002) v1(158.751,34.502) 158.751,49.752
+5V: C13.1 C14.2 DA2.8 HL3.1 R14.2 R15.2 R16.2 R17.2 R29.2 R66.2 R67.2 R68.2 R69.2 VD2.1 VD3.1 VD4.1 VD5.1 VT5.2 XS1.1 | length 333.4
  Top Layer w0.5: R67.2@121.351,78.777 R66.2@121.351,74.277 121.501,74.127 v1(121.501,72.252) ; R69.2@137.351,78.777 R68.2@137.351,74.277 137.501,74.127 v1(137.501,72.252) ; VT5.2@156.451,76.302 156.851,75.902 R29.2@156.851,74.277 156.851,72.902 157.501,72.252 HL3.1@157.501,70.752
  Top Layer w1: v1(157.501,66.252) HL3.1@157.501,70.752
  Top Layer w1.5: v6(163.251,60.502) 186.751,60.502 190.001,63.752 ; v2(208.151,15.002) VD5.1@208.151,17.752 ; VD3.1@215.984,17.752 216.001,17.736 v2(216.001,15.002) ; v2(227.251,15.002) 227.251,16.752 228.251,17.752 VD4.1@228.518,17.752 ; v2(236.351,15.002) VD2.1@236.351,17.752
  Top Layer w2: v2(190.001,56.752) v2(190.001,59.002) v2(190.001,61.252) 190.001,63.752 ; 190.001,63.252 190.001,63.752 ; v3(206.751,46.002) R17.2@209.501,46.002 R15.2@231.084,46.002 v3(233.751,46.002) R14.2@241.501,46.002 v3(244.251,46.002) ; XS1.1@233.626,83.877 XS1.1@233.501,83.752 224.751,75.002 199.001,75.002 190.001,66.002 190.001,63.752 ; v2(236.351,15.002) 239.501,15.002 247.751,23.252 247.751,49.252 v3@244.501,46.002 ; v3(244.251,46.002) 244.251,45.752 v3@244.501,46.002 ; v3(244.251,46.002) v3@244.501,46.002
  Top Layer w3: XS1.1@233.501,83.752 247.251,70.002 247.251,48.746
  Bottom Layer w1.5: v1(121.501,72.252) v1(137.501,72.252) 139.501,70.252 147.001,70.252 149.001,68.252 155.501,68.252 v1(157.501,66.252) v6(163.251,60.502)
  Bottom Layer w2: C13.1@188.501,52.002 190.001,53.502 v2(190.001,56.752) v2(190.001,59.002) v2(190.001,61.252) ; v2(208.151,15.002) v2(216.001,15.002) v2(227.251,15.002) v2(236.351,15.002)
  other v3: 217.251,46.002
+12V-IMP: C5.1 C6.1 L1.2 pad.2@202.751,52.502 R9.2 R9.3 VD7.1 VD8.1 VD9.1 VD10.1 XS3.1 XS7.8 | length 170.1
  Top Layer w1.5: v2(170.901,15.002) VD10.1@170.901,17.752 ; VD9.1@178.734,17.752 178.751,17.736 v2(178.751,15.002) ; v2(190.501,15.002) 190.501,16.986 VD8.1@191.268,17.752 ; v2(199.101,15.002) VD7.1@199.101,17.752
  Top Layer w2: XS7.8@191.946,7.922 196.526,12.502 200.751,12.502 v3(202.751,14.502) ; C5.1@198.721,63.535 204.468,63.535 207.251,60.752 L1.2@213.001,60.752 ; L1.2@212.501,60.752 L1.2@212.751,61.002
  Bottom Layer w2: v2(170.901,15.002) v2(178.751,15.002) v2(190.501,15.002) v2(199.101,15.002) 199.251,15.002 202.751,18.502 ; v3(202.751,14.502) 202.751,18.502 ; 202.751,17.002 202.751,18.502 ; 203.534,63.535 204.501,63.535 204.517,63.519 208.501,67.502 XS3.1@208.501,83.752 ; R9.2@216.711,56.002 R9.3@214.171,56.002 212.001,56.002 204.468,63.535 202.534,63.535 C5.1@198.721,63.535 202.751,59.506 pad.2@202.751,52.502 202.751,18.502
+12V-LINEAR: C11.2 C12.1 C17.2 C19.2 C21.2 C34.2 C35.2 DA1.3 DA4.5 DA8.5 | length 117.9
  Top Layer w0.5: DA8.5@19.701,56.552 19.751,56.602 C21.2@22.751,56.602 24.651,56.602 C19.2@25.751,55.502 26.001,55.752 C12.1@34.251,55.752 ; C12.1@34.251,56.002 42.001,56.002 52.751,56.002 62.001,46.752 v1(69.251,46.752) ; v5(73.001,35.752) v5(89.251,35.752) ; C34.2@91.251,23.252 C34.2@91.251,23.502 v1(91.251,30.252) ; C34.2@91.501,23.002 C35.2@94.151,23.002 ; v1(96.101,22.902) C35.2@94.251,22.902 ; DA4.5@99.451,21.452 99.501,21.502 v1(99.501,22.902) v1@99.501,23.002 ; C35.2@94.151,23.002 C35.2@94.251,22.902 ; C35.2@94.151,23.002 C35.2@94.251,22.902
  Top Layer w1: DA1.3@30.776,63.712 33.041,63.712 34.251,62.502 34.251,56.002 C12.1@34.251,55.752
  Bottom Layer w0.5: v1(69.251,46.752) 70.001,46.752 71.001,45.752 71.001,36.502 71.751,35.752 v5(73.001,35.752) ; v5(89.251,35.752) 90.251,34.752 90.251,31.252 v1(91.251,30.252) ; v1@96.101,23.102 v1(96.101,22.902) v1(99.501,22.902)
+24V: C1.1 C3.2 C4.1 C9.1 C10.2 C20.2 DA1.1 DA3.3 pad.0 R5.2 R11.2 R19.2 R72.2 R73.2 U1.7 VD11.1 VD12.1 XS2.2 XS4.1 XS8.1 XS14.1 XS15.1 | length 384.4
  Top Layer w0.5: C20.2@63.151,76.252 63.151,76.117 C3.2@66.251,73.017 C3.2@65.751,73.017 ; DA3.3@65.651,64.997 64.271,64.997 63.751,65.517 63.751,70.502 65.751,72.502 C3.2@65.751,73.017 ; C3.2@65.651,73.752 65.651,73.117 C3.2@65.751,73.017 ; 71.251,87.252 72.001,87.252 ; R11.2@72.851,69.542 74.026,69.542 74.751,70.267 v1(74.751,72.28) ; R5.2@72.851,72.28 v1(74.751,72.28) ; R19.2@76.501,72.28 v1(74.751,72.28) ; R72.2@176.226,74.852 176.226,78.377 VD11.1@176.851,79.002 ; VD12.1@191.851,79.002 191.251,78.402 191.251,74.852 R73.2@191.976,74.852
  Top Layer w1: DA1.1@30.776,68.792 33.041,68.792 35.001,70.752 C10.2@35.001,74.502 C9.1@35.001,82.252 ; XS8.1@57.281,81.687 57.281,84.532 60.001,87.252 ; C3.2@66.251,73.017 66.501,73.267 v1(66.501,75.502) 66.501,80.752 68.251,82.502 68.251,84.002 71.501,87.252 ; XS4.1@72.281,81.687 72.281,84.282 75.251,87.252 ; R5.2@72.851,72.28 R5.2@72.864,72.267 ; XS14.1@170.031,81.687 174.936,81.687 176.251,83.002 ; VD11.1@176.851,79.002 176.251,79.602 176.251,83.002 ; 178.501,87.252 176.251,85.003 176.251,83.002 ; XS15.1@185.031,81.687 189.686,81.687 191.251,83.252 ; VD12.1@191.251,78.852 191.251,83.252 ; 193.501,87.252 191.251,85.002 191.251,83.252 ; U1.7@228.651,62.087 231.736,62.087 C4.1@231.751,62.102
  Top Layer w2: C9.1@35.001,82.252 40.001,87.252 215.001,87.252 XS2.2@218.501,83.752 ; 71.751,87.252 75.251,87.252 ; 178.501,87.252 185.501,87.252
  Bottom Layer w0.5: v1(66.501,75.502) 67.779,75.502 71.001,72.28 v1(74.751,72.28)
  Bottom Layer w1: v1(74.751,72.28) v1@74.778,72.252
  Bottom Layer w2: XS2.2@218.501,83.752 218.501,69.252 224.301,63.452 ; C1.1@241.001,63.452 224.301,63.452 ; pad.0@241.251,52.502 241.001,52.502 230.051,63.452 224.301,63.452
AIR_EXTRACT_SENSOR: C25.2 DD3.3 R50.2 | length 33.4
  Top Layer w0.3: C25.2@95.251,72.102 95.301,72.152 R50.2@98.026,72.152 ; R50.2@97.501,72.152 98.001,71.652 98.001,62.752 100.001,60.752 103.251,60.752 109.001,55.002 DD3.3@109.001,48.252
AIR_PRESSURE_SENSOR: C24.2 DD3.4 R49.2 | length 48
  Top Layer w0.3: R49.2@85.276,72.152 82.601,72.152 82.501,72.252 C24.2@82.501,72.102 82.501,62.502 85.001,60.002 103.251,60.002 108.501,54.752 DD3.4@108.501,48.552
ALARM_STATE_CON: R82.1 R83.2 R85.1 XP2.14 | length 31.5
  Top Layer w0.5: XP2.14@109.686,5.082 112.016,2.752 121.751,2.752 125.201,6.202 125.201,9.102 127.351,11.252 127.351,13.324 R85.1@127.273,13.402 R82.1@132.766,13.402